# EAGLE board v001 (EAGLE 6.4)
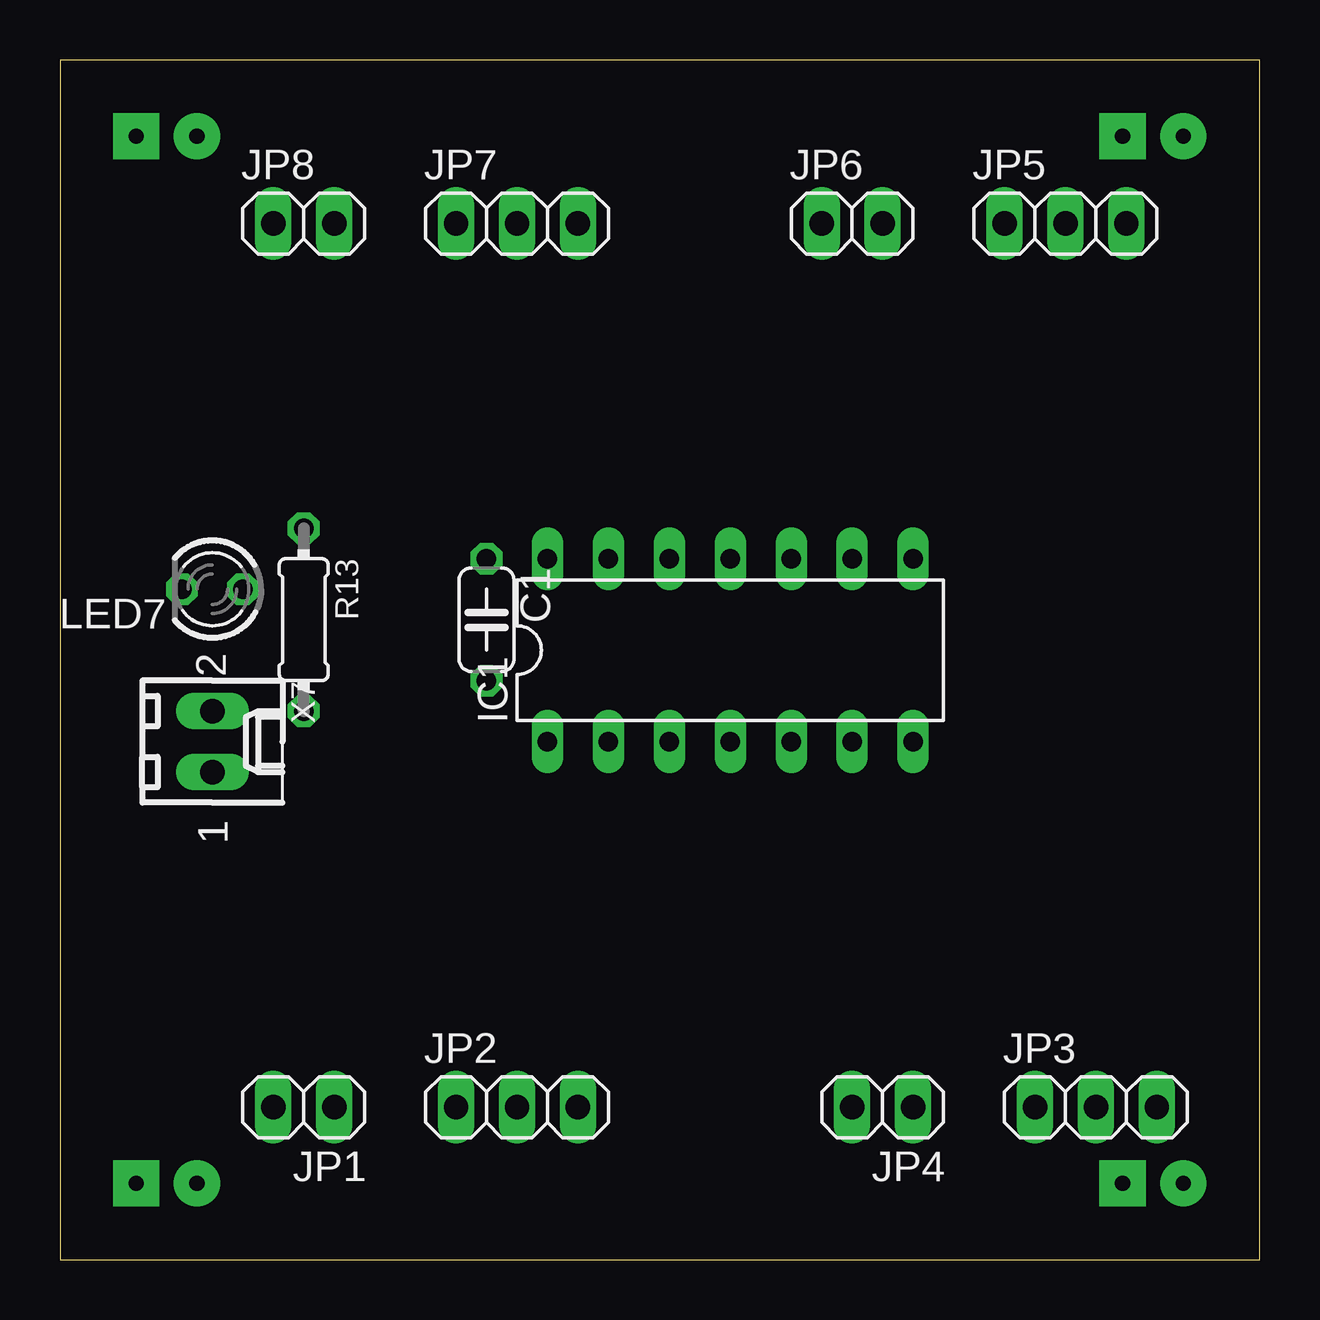
[diagram p0: board, top side]
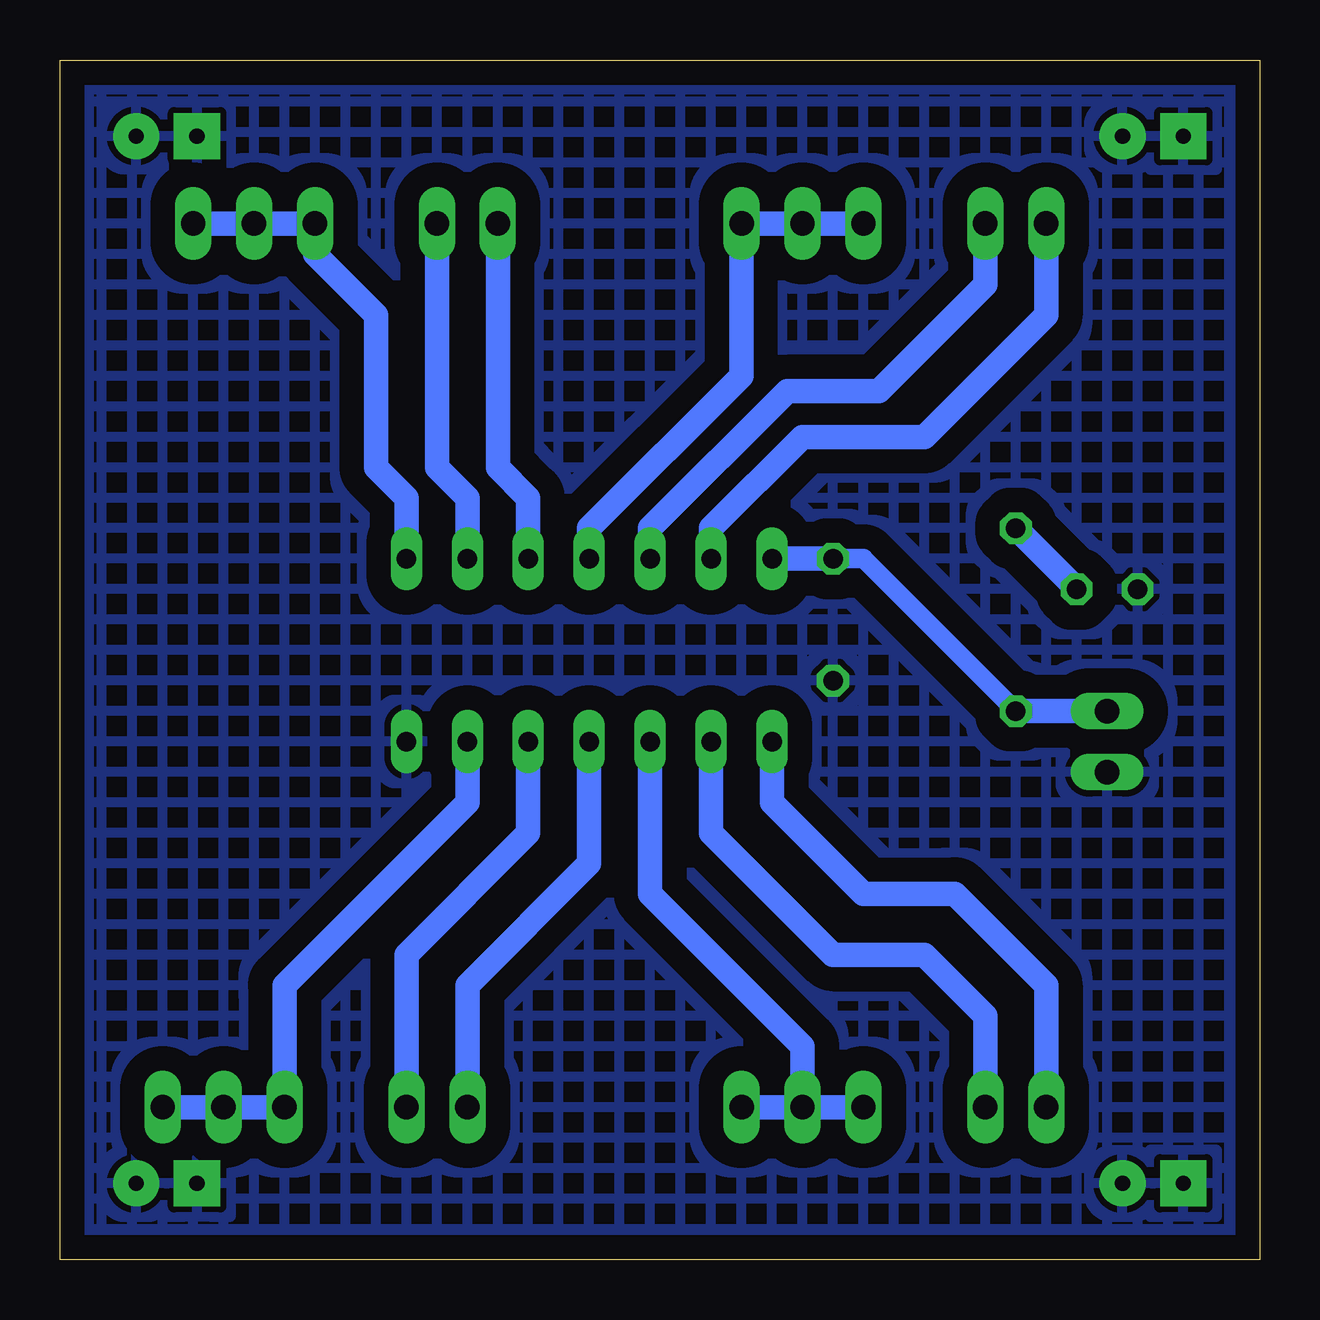
[diagram p1: board, bottom side, seen from below]

Size 50 x 50 mm. Coordinates in mm from the lower left corner, seen from the top.
Outline: 0,0 50,0 50,50 0,50 0,0
Copper layers (1*16): Top 0.035mm / dielectric 1.5mm / Bottom 0.035mm
Design rules "default": minimum track width 10mil, minimum drill 24mil, track to track 8mil, track to pad 8mil, pad to pad 8mil, via to via 8mil, smd to smd 8mil, copper to edge 40mil, drill to drill 8mil, minimum pad ring 10mil, minimum via ring 8mil, stop-mask expansion 4mil, vias tented up to drill 0mil, thermal gap 10mil

## Footprints (pad centres in the part's own frame; a part is rotated, then mirrored left to right if it is on the bottom)
C050-024X044 = drill 0.813 octagon: 1 -2.54,0; 2 2.54,0
DIL14 = drill 0.813 long: 1 -7.62,-3.81; 2 -5.08,-3.81; 3 -2.54,-3.81; 4 0,-3.81; 5 2.54,-3.81; 6 5.08,-3.81; 7 7.62,-3.81; 8 7.62,3.81; 9 5.08,3.81; 10 2.54,3.81; 11 0,3.81; 12 -2.54,3.81; 13 -5.08,3.81; 14 -7.62,3.81
1X02 = drill 1.016 long: 1 -1.27,0; 2 1.27,0
1X03 = drill 1.016 long: 1 -2.54,0; 2 0,0; 3 2.54,0
LED3MM = drill 0.813 octagon: A -1.27,0; K 1.27,0
PCB_05X05 = drill 0.64 pad 1.93 square: GND@1 3.175,46.825; GND@2 44.285,46.825; GND@7 3.175,3.175; GND@8 44.285,3.175 | drill 0.64 pad 1.93: GND@3 46.825,46.825; GND@4 5.715,46.825; GND@5 46.825,3.175; GND@6 5.715,3.175
0204/7 = drill 0.813 octagon: 1 -3.81,0; 2 3.81,0
6410-02 = drill 1.016 long: 1 1.27,0; 2 -1.27,0

## Placement (x,y rotation side)
C1  0.1uF  [C050-024X044]  17.78,26.67 270 top
IC1  Like 7408  [DIL14]  27.94,25.4 0 top
JP1  [1X02]  10.16,6.35 180 top
JP2  Output  [1X03]  19.05,6.35 0 top
JP3  Output  [1X03]  43.18,6.35 0 top
JP4  [1X02]  34.29,6.35 180 top
JP5  Output  [1X03]  41.91,43.18 0 top
JP6  [1X02]  33.02,43.18 0 top
JP7  Output  [1X03]  19.05,43.18 0 top
JP8  [1X02]  10.16,43.18 0 top
LED7  Green  [LED3MM]  6.35,27.94 180 top
PCB1  PCB05X05  [PCB_05X05]  0,0 0 top
R13  470R  [0204/7]  10.16,26.67 270 top
X7  Power  [6410-02]  6.35,21.59 270 top

## Library data of the parts
C1 R13 = rcl
IC1 = 74xx-us
JP1-JP8 = pinhead
LED7 = led
PCB1 = GNLib
X7 = con-molex

## Nets
+5V: C1.1 IC1.14 R13.2 X7.2
GND: C1.2 IC1.7 LED7.K PCB1.GND@1 PCB1.GND@2 PCB1.GND@3 PCB1.GND@4 PCB1.GND@5 PCB1.GND@6 PCB1.GND@7 PCB1.GND@8 X7.1
N$1: IC1.1 JP1.2
N$2: IC1.2 JP1.1
N$3: IC1.3 JP2.1 JP2.2 JP2.3
N$4: IC1.4 JP4.2
N$5: LED7.A R13.1
N$6: IC1.5 JP4.1
N$7: IC1.6 JP3.1 JP3.2 JP3.3
N$8: IC1.9 JP6.2
N$9: IC1.10 JP6.1
N$10: IC1.8 JP5.1 JP5.2 JP5.3
N$11: IC1.12 JP8.2
N$12: IC1.13 JP8.1
N$13: IC1.11 JP7.1 JP7.2 JP7.3

## Tracks (layer width: path | path; a pad name or v marks a point on that pad's centre or on a via)
+5V
  Bottom 0.813: C1.1 16.51,29.21 R13.2
  Bottom 1.016: C1.1 IC1.14 | R13.2 X7.2
GND
  pour Bottom (isolate 1.016, hatched): 0,0 50.16,0 50.16,50.16 0,50.16
N$1
  Bottom 1.016: IC1.1 20.32,19.05 16.51,15.24 12.7,15.24 8.89,11.43 JP1.2
N$2
  Bottom 1.016: IC1.2 22.86,17.78 17.78,12.7 13.97,12.7 11.43,10.16 JP1.1
N$3
  Bottom 1.016: IC1.3 25.4,15.24 19.05,8.89 JP2.2 | JP2.2 JP2.1 | JP2.2 JP2.3
N$4
  Bottom 1.016: IC1.4 27.94,16.51 33.02,11.43 JP4.2
N$5
  Bottom 1.016: R13.1 LED7.A
N$6
  Bottom 1.016: IC1.5 30.48,17.78 35.56,12.7 JP4.1
N$7
  Bottom 1.016: IC1.6 33.02,19.05 40.64,11.43 JP3.1 JP3.2 JP3.3
N$8
  Bottom 1.016: IC1.9 33.02,31.75 34.29,33.02 JP6.2
N$9
  Bottom 1.016: IC1.10 30.48,31.75 31.75,33.02 JP6.1
N$10
  Bottom 1.016: IC1.8 35.56,31.75 36.83,33.02 36.83,39.37 39.37,41.91 JP5.1 JP5.2 JP5.3
N$11
  Bottom 1.016: JP8.2 11.43,40.64 15.88,36.2 19.68,36.2 25.4,30.48 IC1.12
N$12
  Bottom 1.016: JP8.1 8.89,39.37 13.97,34.29 19.05,34.29 22.86,30.48 IC1.13
N$13
  Bottom 1.016: JP7.1 JP7.2 JP7.3 21.59,36.83 27.94,30.48 IC1.11